# EAGLE board epapertagjig (EAGLE 9.6.2)
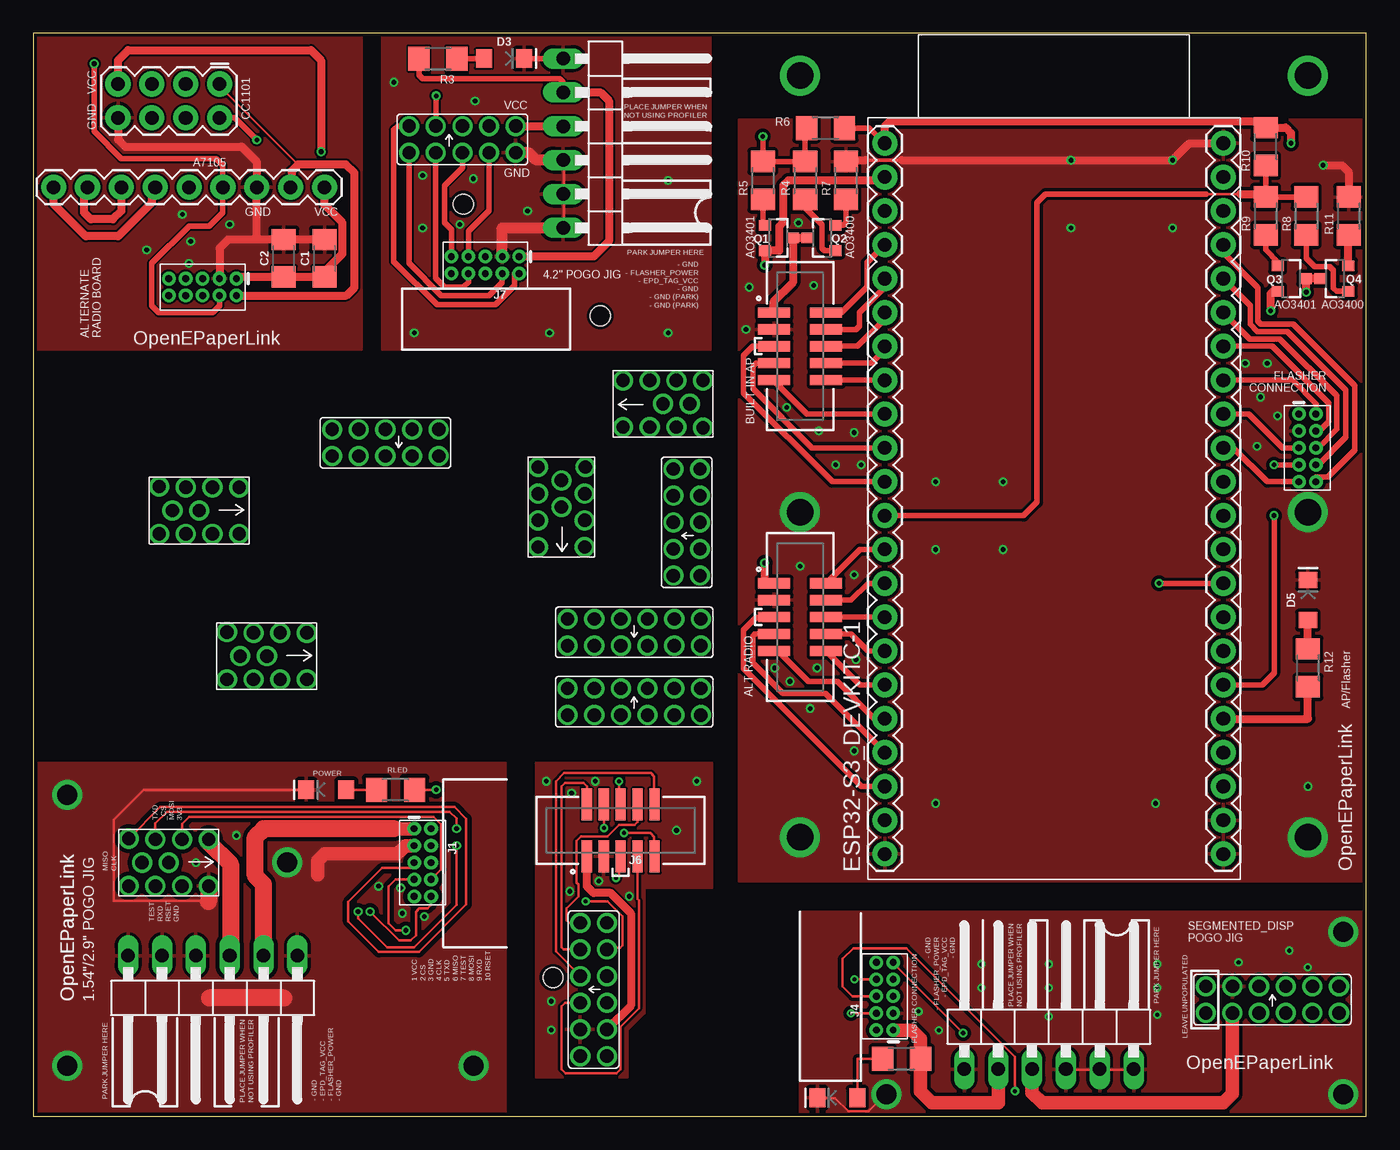
[diagram p0: board, top side]
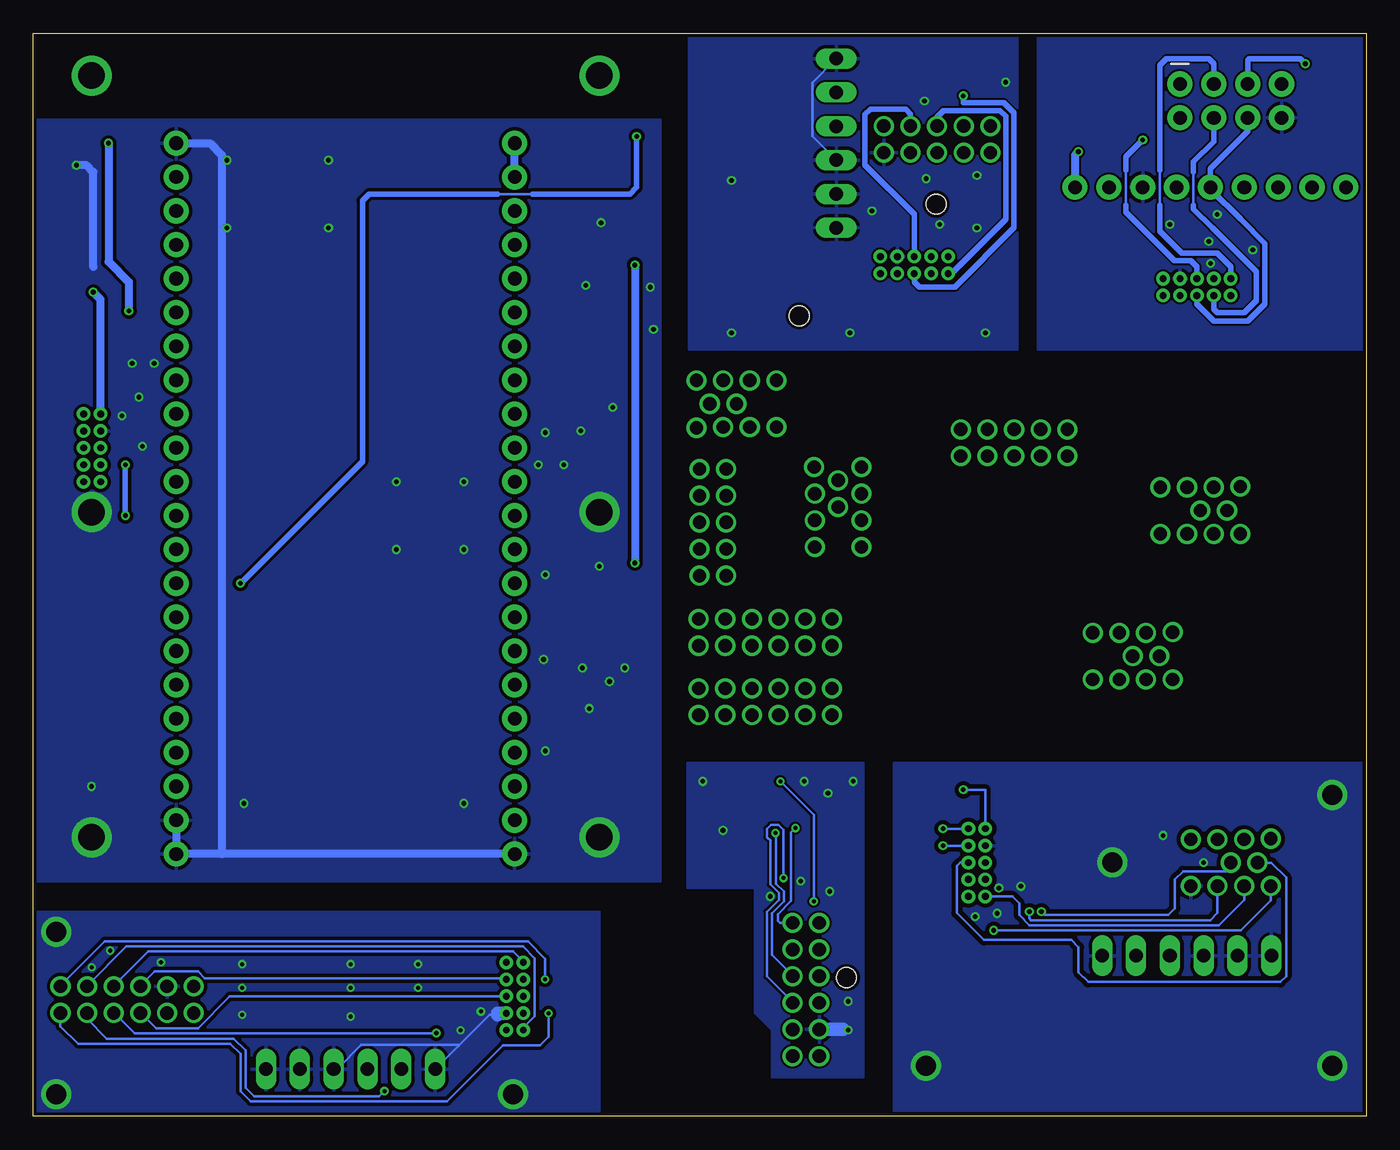
[diagram p1: board, bottom side, seen from below]

Size 100 x 81.27 mm. Coordinates in mm from the lower left corner, seen from the top.
Outline: 0,0 100,0 100,81.27 0,81.27 0,0
Copper layers (1*16): Top 0.035mm / dielectric 1.5mm / Bottom 0.035mm
Design rules "dirt_cheap_dirty_boards.v1.1": minimum track width 6mil, minimum drill 12mil, track to track 6mil, track to pad 6mil, pad to pad 6mil, via to via 6mil, smd to smd 0mil, copper to edge 10mil, drill to drill 10mil, minimum pad ring 10mil, minimum via ring 6mil, stop-mask expansion 2mil, vias tented up to drill 25mil, thermal gap 10mil
Net classes: 0 default: width 0.203 mm
Holes 1.5 mm at 38.99,10.41 32.26,68.45 42.55,60.07

## Footprints (pad centres in the part's own frame; a part is rotated, then mirrored left to right if it is on the bottom)
2X5-SMD-1.27MM = smd 0.76 x 2.4: 1 2.54,1.95; 2 2.54,-1.95; 3 1.27,1.95; 4 1.27,-1.95; 5 0,1.95; 6 0,-1.95; 7 -1.27,1.95; 8 -1.27,-1.95; 9 -2.54,1.95; 10 -2.54,-1.95
1206 = smd 1.6 x 1.8: 1 -1.4,0; 2 1.4,0
LED-1206 = smd 1.2 x 1.4: A -1.5,0; C 1.5,0
2X5-PTH-1.27MM = drill 0.508 pad 1: 1 -2.54,-0.635; 2 -2.54,0.635; 3 -1.27,-0.635; 4 -1.27,0.635; 5 0,-0.635; 6 0,0.635; 7 1.27,-0.635; 8 1.27,0.635; 9 2.54,-0.635; 10 2.54,0.635
SOLUM_ZBS_DEBUG = drill 1 pad 1.27: 3V3 -2.995,-1.744; CLK 0.005,0.006; CS 1.005,-1.744; GND -2.995,1.756; MISO 2.005,0.006; MOSI -0.995,-1.744; RSET -0.995,1.756; RXD 1.005,1.756; TEST 3.005,1.756; TXD 3.005,-1.794
SOLUM_ZBS_DEBUG_SEG = drill 1 pad 1.27: _CS 3,1; CLK 5,-1; EPD_BG -5,-1; EPD_VCOM -5,1; GND -3,1; MISO 3,-1; MOSI 5,1; RSET 1,1; RXD 1,-1; TEST -1,1; TXD -1,-1; VCC -3,-1
SOLUM_ZBS_DEBUG_4.2 = drill 1 pad 1.27: _CS -4,1; CLK -4,-1; GND 4,-1; MISO -2,1; MOSI -2,-1; RSET 0,1; RXD 0,-1; TEST 2,-1; TXD 2,1; VCC 4,1
ESP32-S3_DEVKITC-1 = drill 1.016 pad 1.88: 0 20.32,-25.4; 1 45.72,-25.4; 2 43.18,-25.4; 3 22.86,0; 3V3-1 53.34,0; 3V3-2 50.8,0; 4 45.72,0; 5 43.18,0; 5V 2.54,0; 6 40.64,0; 7 38.1,0; 8 25.4,0; 9 17.78,0; 10 15.24,0; 11 12.7,0; 12 10.16,0; 13 7.62,0; 14 5.08,0; 15 35.56,0; 16 33.02,0; 17 30.48,0; 18 27.94,0; 19 5.08,-25.4; 20 7.62,-25.4; 21 10.16,-25.4; 35 22.86,-25.4; 36 25.4,-25.4; 37 27.94,-25.4; 38 30.48,-25.4; 39 33.02,-25.4; 40 35.56,-25.4; 41 38.1,-25.4; 42 40.64,-25.4; 45 17.78,-25.4; 46 20.32,0; 47 12.7,-25.4; 48 15.24,-25.4; GND_1 0,0; GND_2 0,-25.4; GND_3 2.54,-25.4; GND_4 53.34,-25.4; RSET 48.26,0; RX 48.26,-25.4; TX 50.8,-25.4
1X09 = drill 1.016 pad 1.88: 1 0,0; 2 2.54,0; 3 5.08,0; 4 7.62,0; 5 10.16,0; 6 12.7,0; 7 15.24,0; 8 17.78,0; 9 20.32,0
2X4 = drill 1.016 pad 1.88: 1 -3.81,-1.27; 2 -3.81,1.27; 3 -1.27,-1.27; 4 -1.27,1.27; 5 1.27,-1.27; 6 1.27,1.27; 7 3.81,-1.27; 8 3.81,1.27
1X06/90 = drill 1.016 long: 1 -6.35,-3.81; 2 -3.81,-3.81; 3 -1.27,-3.81; 4 1.27,-3.81; 5 3.81,-3.81; 6 6.35,-3.81
SOT23-3 = smd 0.8 x 0.9: 1 -0.95,-1; 2 0.95,-1; 3 0,1.1
R1206 = smd 1.6 x 1.803: 1 -1.422,0; 2 1.422,0

## Placement (x,y rotation side)
ALTN_RADIO  JTAG  [2X5-SMD-1.27MM]  57.53,37.47 90 top
C1  1.0uF  [1206]  21.84,64.39 90 top
C2  1.0uF  [1206]  18.8,64.39 90 top
D1  [LED-1206]  21.97,24.51 180 top
D2  [LED-1206]  60.33,1.4 180 top
D3  [LED-1206]  35.31,79.38 0 top
D5  [LED-1206]  95.63,38.74 90 top
FLASHER_EDGE  CORTEX_JTAG_DEBUG_PTH  [2X5-PTH-1.27MM]  95.59,50.17 270 top
INTERNAL_AP  JTAG  [2X5-SMD-1.27MM]  57.53,57.79 90 top
J1  CORTEX_JTAG_DEBUG_PTH  [2X5-PTH-1.27MM]  29.21,19.05 270 top
J2  [SOLUM_ZBS_DEBUG]  10.16,19.05 180 top
J3  [SOLUM_ZBS_DEBUG_SEG]  92.96,8.76 0 top
J4  CORTEX_JTAG_DEBUG_PTH  [2X5-PTH-1.27MM]  63.88,9.02 90 top
J5  [SOLUM_ZBS_DEBUG_SEG]  42.04,9.53 90 top
J6  JTAG  [2X5-SMD-1.27MM]  44.07,21.46 180 top
J7  CORTEX_JTAG_DEBUG_PTH  [2X5-PTH-1.27MM]  33.91,63.88 180 top
J8  [SOLUM_ZBS_DEBUG_4.2]  32.2,73.31 0 top
J9  ESP32-S3_DEVKITC-1  [ESP32-S3_DEVKITC-1]  63.88,19.68 90 top
J10  CORTEX_JTAG_DEBUG_PTH  [2X5-PTH-1.27MM]  12.7,62.23 180 top
J11  [1X09]  21.84,69.72 180 top
J12  [2X4]  10.16,76.2 180 top
J13  [SOLUM_ZBS_DEBUG]  17.53,34.54 180 top
J14  [SOLUM_ZBS_DEBUG_SEG]  45.09,31.11 0 top
J15  [SOLUM_ZBS_DEBUG_4.2]  49.02,44.58 90 top
J16  [SOLUM_ZBS_DEBUG]  12.45,45.47 180 top
J17  [SOLUM_ZBS_DEBUG_SEG]  45.09,36.32 180 top
J18  [SOLUM_ZBS_DEBUG]  47.24,53.47 0 top
J19  [SOLUM_ZBS_DEBUG]  39.62,45.72 90 top
J20  [SOLUM_ZBS_DEBUG_4.2]  26.42,50.55 180 top
JP1  [1X06/90]  13.46,8.26 180 top
JP2  [1X06/90]  76.2,7.37 0 top
JP3  [1X06/90]  43.56,73.02 270 top
Q1  1.1A/60V/600mΩ  [SOT23-3]  55.88,65.91 270 top
Q2  5.8A/30V/35mΩ  [SOT23-3]  59.18,65.91 90 top
Q3  1.1A/60V/600mΩ  [SOT23-3]  94.36,62.87 270 top
Q4  5.8A/30V/35mΩ  [SOT23-3]  97.66,62.87 90 top
R1  [R1206]  27.18,24.51 0 top
R2  [R1206]  65.15,4.32 0 top
R3  [R1206]  30.35,79.38 180 top
R4  100  [R1206]  57.91,70.23 90 top
R5  100  [R1206]  54.74,70.23 90 top
R6  4k7  [R1206]  59.44,74.17 180 top
R7  47  [R1206]  60.96,70.23 90 top
R8  100  [R1206]  95.5,67.56 90 top
R9  100  [R1206]  92.46,67.56 90 top
R10  4k7  [R1206]  92.46,72.77 270 top
R11  47  [R1206]  98.68,67.56 90 top
R12  [R1206]  95.63,33.66 270 top

## Library data of the parts
ALTN_RADIO INTERNAL_AP J6 = SparkFun-Connectors; PROD_ID: CONN-14503
C1 C2 = SparkFun-Capacitors; PROD_ID: CAP-09822
D1-D3 D5 = SparkFun-LED
FLASHER_EDGE J1-J5 J7-J20 = SparkFun-Connectors
JP1-JP3 = pinhead
Q1 Q3 = SparkFun-DiscreteSemi; PROD_ID: TRANS-08285
Q2 Q4 = SparkFun-DiscreteSemi; PROD_ID: TRANS-12988
R1-R12 = rcl; SPICEPREFIX: R

## Nets
3V1: J8.VCC JP3.3
3V3: J2.3V3 JP1.3
GND: D1.C J1.3 J2.GND JP1.1 JP1.4 JP1.5 JP1.6
GND1: J5.GND J6.3
GND2: D2.C J3.GND J4.3 JP2.1 JP2.4 JP2.5 JP2.6
GND3: D3.C J7.3 J8.GND JP3.1 JP3.4 JP3.5 JP3.6
N$1: D2.A R2.1
N$2: D1.A R1.1
N$3: D3.A R3.1
N$4: J4.1 JP2.2 R2.2
N$5: J1.4 J2.CLK
N$6: J1.2 J2.CS
N$7: J1.6 J2.MISO
N$8: J3._CS J4.2
N$9: J1.8 J2.MOSI
N$10: J1.10 J2.RSET
N$11: J1.9 J2.RXD
N$12: J1.7 J2.TEST
N$13: J1.5 J2.TXD
N$14: J3.CLK J4.4
N$15: J3.MISO J4.6
N$16: J3.MOSI J4.8
N$17: J3.RSET J4.10
N$18: J3.VCC JP2.3
N$19: J3.RXD J4.9
N$20: J3.TEST J4.7
N$21: J3.TXD J4.5
N$22: J7.4 J8.CLK
N$23: J5._CS J6.2
N$24: J5.CLK J6.4
N$25: J5.MISO J6.6
N$26: J5.MOSI J6.8
N$27: J5.RSET J6.10
N$28: J5.VCC J6.1
N$29: J5.RXD J6.9
N$30: J5.TEST J6.7
N$31: J5.TXD J6.5
N$32: J7.2 J8._CS
N$33: J7.6 J8.MISO
N$34: J7.8 J8.MOSI
N$35: J7.10 J8.RSET
N$36: J7.9 J8.RXD
N$37: J7.7 J8.TEST
N$38: J7.5 J8.TXD
N$39: INTERNAL_AP.1 Q1.3 Q2.3
N$40: Q2.2 R7.1
N$41: J9.0 R4.2 R5.2 R6.2
N$42: Q2.1 R4.1
N$43: Q1.1 R5.1
N$44: FLASHER_EDGE.1 Q3.3 Q4.3
N$45: J9.8 R8.2 R9.2 R10.2
N$46: Q4.1 R8.1
N$47: Q3.1 R9.1
N$48: Q4.2 R11.1
N$49: INTERNAL_AP.5 J9.18
N$50: INTERNAL_AP.9 J9.16
N$52: INTERNAL_AP.10 J9.15
N$53: INTERNAL_AP.8 J9.7
N$54: INTERNAL_AP.6 J9.6
N$55: INTERNAL_AP.4 J9.5
N$56: INTERNAL_AP.2 J9.4
N$57: FLASHER_EDGE.6 J9.42
N$58: FLASHER_EDGE.10 J9.1
N$59: FLASHER_EDGE.8 J9.2
N$60: FLASHER_EDGE.4 J9.41
N$61: FLASHER_EDGE.2 J9.40
N$62: ALTN_RADIO.2 J9.3
N$63: ALTN_RADIO.4 J9.46
N$64: ALTN_RADIO.6 J9.9
N$65: ALTN_RADIO.8 J9.10
N$66: ALTN_RADIO.10 J9.11
N$67: ALTN_RADIO.9 J9.12
N$68: ALTN_RADIO.7 J9.13
N$69: ALTN_RADIO.5 J9.14
N$70: FLASHER_EDGE.5 J9.39
N$71: FLASHER_EDGE.9 J9.38
N$72: FLASHER_EDGE.7 J9.47
N$73: INTERNAL_AP.7 J9.17
N$75: J9.21 R12.2
N$76: D5.A R12.1
N$77: C1.1 C2.1 J10.1 J11.1 J12.7
N$78: J11.7 J11.8
N$79: C1.2 C2.2 J10.3 J11.3 J12.8
N$80: J11.6 J11.9
N$81: J10.6 J11.5 J12.6
N$82: J10.4 J11.4 J12.5
N$83: J10.2 J11.2 J12.1
N$84: J10.8 J12.4
N$86: J10.5 J12.2
N$87: J10.9 J12.3
V_IN: J1.1 JP1.2 R1.2
V_IN1: J7.1 JP3.2 R3.2
VDD: ALTN_RADIO.1 J9.3V3-1 J9.3V3-2 Q1.2 Q3.2 R6.1 R10.1
VSS: ALTN_RADIO.3 D5.C FLASHER_EDGE.3 INTERNAL_AP.3 J9.GND_1 J9.GND_2 J9.GND_3 J9.GND_4 R7.2 R11.2

## Tracks (layer width: path | path; a pad name or v marks a point on that pad's centre or on a via)
3V1
  Top 0.61: J8.VCC 39.75,74.31 JP3.3
3V3
  Top 1.27: J2.3V3 13.15,20.58 14.8,18.94 14.8,12.83 14.86,12.83 14.86,12.06 JP1.3
GND  (via drill 0.35, 1.5)
  Top 0.203: 13.15,16.13 13.15,16.18 6.04,16.18 6.04,22.26 8.3,24.51 D1.C
  Top 1.016: 21.32,18.11 21.32,19.16 21.84,19.68 27.3,19.68 27.94,20.32 J1.3
  Top 1.27: J2.GND 13.15,16.13 | 18.8,8.89 13.21,8.89
  other vias: 15.24,21.08 25.91,17.27 27.69,15.24 27.56,17.14 29.34,14.99 12.19,19.05 19.05,19.05 2.54,24.13 2.54,3.81 33.02,3.81
  pour Top (isolate 0.305): 0.13,26.54 35.43,26.54 35.43,0.13 0.13,0.13
  pour Bottom (isolate 0.305): 0.13,26.54 35.43,26.54 35.43,0.13 0.13,0.13
GND1  (via drill 0.35)
  Bottom 1.016: J5.GND 39.24,6.53
  other vias: 42.42,17.65 44.7,16.51 38.86,8.64 38.86,6.48 48.26,21.46 49.78,25.15 38.48,25.15 40.26,16.89 40.39,24.26 42.16,25.15
  pour Top: 37.72,26.54 50.93,26.54 50.93,17.14 45.85,17.14 45.85,7.75 44.58,6.48 44.58,2.92 37.72,2.92
  pour Bottom: 37.72,2.92 44.58,2.92 44.58,6.48 45.85,7.75 45.85,17.14 50.93,17.14 50.93,26.54 37.72,26.54
GND2  (via drill 0.3, 1.5)
  Top 0.203: JP2.4 77.52,3.51 79.89,3.51 JP2.5 | 80.27,3.51 80.02,3.51 JP2.5 | 80.27,3.51 82.52,3.51 JP2.6 | D2.C 58.89,1.38 60.14,1.38 61.14,0.38 62.64,0.38 63.89,1.63 v64.01,1.65 | 80.27,3.51 JP2.5
  Bottom 0.203: 65.15,7.63 65.77,7.63 68.08,5.32 | 68.08,5.32 69.77,3.63 JP2.1 | JP2.4 77.39,3.63 77.14,3.63 75.39,5.38 68.14,5.38 68.08,5.32
  Bottom 1.016: J4.3 65.15,7.75 65.15,7.63
  other vias: 98.3,1.65 98.3,13.84 94.23,12.45 95.63,11.18 84.33,11.43 90.42,11.56 84.33,9.65 76.2,11.43 76.2,9.65 71.12,11.43 71.12,9.65 76.2,7.49 84.33,7.62 66.42,7.87 67.94,6.48
  pour Top (isolate 0.254): 57.53,15.37 57.53,0.13 99.82,0.13 99.82,15.37
  pour Bottom (isolate 0.254): 57.53,15.37 57.53,0.13 99.82,0.13 99.82,15.37
GND3  (via drill 0.35)
  Top 0.203: JP3.4 39.81,71.69 39.81,69.31 JP3.5 39.81,69.19 39.81,66.69 JP3.6
  Top 0.406: JP3.1 D3.C
  Top 0.813: 39.81,66.69 35.18,66.69 J7.3 | JP3.4 37.72,71.75 37.16,72.31 J8.GND
  Bottom 0.203: JP3.1 39.81,79.31 41.56,77.56 41.56,73.56 39.81,71.81 JP3.4
  other vias: 27.05,77.6 33.15,76.2 32,66.93 29.21,66.67 29.21,70.61 33.02,70.36 28.57,58.8 37.08,67.94 38.73,58.8 47.62,58.8 47.62,70.23
  pour Top: 50.8,57.53 50.8,81.15 26.16,81.15 26.16,57.53
  pour Bottom: 26.16,81.15 26.16,57.53 50.8,57.53 50.8,81.15
N$1
  Top 0.203: R2.1 61.83,4.32 D2.A
N$2
  Top 0.203: R1.1 D1.A
N$3
  Top 0.406: D3.A R3.1
N$4
  Top 1.016: JP2.2 72.39,1.02 67.44,1.02 66.57,1.88 R2.2 66.57,5.82 65.91,6.48 J4.1
N$5  (via drill 0.35)
  Top 0.203: v24.36,15.37 24.36,14.88 26.54,12.7 28.57,12.7 31.75,15.88 v31.75,20.32
  Bottom 0.203: v24.36,15.37 24.38,15.37 24.13,15.11 14.86,15.11 14.35,15.62 14.35,17.78 13.73,18.4 10.15,18.4 J2.CLK | v31.75,20.32 J1.4
N$6  (via drill 0.35)
  Top 0.203: J2.CS 9.15,21.98 10.03,22.86 31.24,22.86 31.75,22.35 v31.75,21.59
  Bottom 0.203: v31.75,21.59 J1.2
N$7
  Bottom 0.203: J2.MISO 7.1,19.04 5.99,17.93 5.99,10.52 6.43,10.08 20.85,10.08 21.59,10.82 21.59,12.7 22.13,13.24 28.67,13.24 30.71,15.27 30.71,18.8 30.45,19.05 J1.6
N$8
  Bottom 0.203: J4.2 63.14,6.51 63.14,6.76 62.39,7.51 62.39,11.88 63.27,12.76 93.02,12.76 95.89,9.88 J3._CS
N$9
  Top 0.203: J1.8 30.61,18.54 30.61,21.91 30.03,22.48 11.68,22.48 11.15,21.95 J2.MOSI
N$10  (via drill 0.35)
  Top 0.203: v25.27,15.37 27.43,13.21 28.32,13.21 28.7,13.59 28.7,15.37 28.96,15.62 29.59,15.62 29.84,15.88 J1.10
  Bottom 0.203: J2.RSET 11.15,15.26 11.68,14.73 25.15,14.73 25.27,14.86 v25.27,15.37
N$11
  Bottom 0.203: J2.RXD 9.15,16.25 11.05,14.35 25.27,14.35 26.04,15.11 26.04,16 26.54,16.51 J1.9
N$12  (via drill 0.35)
  Top 0.203: v27.94,13.97 27.18,13.97 26.67,14.48 26.67,17.27 27.18,17.78 J1.7
  Bottom 0.203: J2.TEST 7.16,16.21 9.4,13.97 v27.94,13.97
N$13
  Top 0.203: J2.TXD 9.53,23.22 31.6,23.22 32.48,22.33 32.48,15.9 28.93,12.34 25.92,12.34 23.63,14.63 23.63,16.1 26.17,18.64 28.57,18.64 J1.5
N$14  (via drill 0.3)
  Top 0.203: J4.4 v61.34,7.75
  Bottom 0.203: v61.34,7.75 61.34,5.97 61.98,5.33 64.77,5.33 68.96,1.14 83.69,1.14 84.45,1.91 84.45,4.7 85.22,5.46 96.65,5.46 97.96,6.78 J3.CLK
N$15  (via drill 0.3)
  Top 0.203: J4.6 61.47,9.02 60.71,9.78 60.71,11.81 61.53,12.63 65.52,12.63 73.66,4.49 73.66,4.47 v73.66,1.91
  Bottom 0.203: J3.MISO 95.96,7.32 94.49,5.84 84.96,5.84 84.07,4.95 84.07,2.16 83.44,1.52 74.04,1.52 v73.66,1.91
N$16  (via drill 0.3)
  Top 0.203: v61.59,10.29 J4.8
  Bottom 0.203: J3.MOSI 97.89,9.88 94.64,13.13 62.89,13.13 61.59,11.84 v61.59,10.29
N$17
  Bottom 0.203: J4.10 63.27,11.63 64.02,12.38 91.39,12.38 93.89,9.88 J3.RSET
N$18
  Top 1.016: JP2.3 74.93,1.78 75.69,1.02 89.28,1.02 89.96,1.7 J3.VCC
N$19  (via drill 0.35)
  Top 0.203: v69.77,6.26 64.52,11.51 J4.9
  Bottom 0.203: v69.77,6.26 92.39,6.26 93.89,7.76 J3.RXD
N$20
  Bottom 0.203: J4.7 64.52,10.38 87.14,10.38 87.64,10.88 90.89,10.88 91.89,9.88 J3.TEST
N$21
  Bottom 0.203: J4.5 64.52,9.01 85.27,9.01 87.64,6.63 90.77,6.63 91.89,7.76 J3.TXD
N$22
  Top 0.406: J7.4 35.18,62.58 34.2,61.6 30.61,61.6 28.19,64.01 J8.CLK
N$23
  Top 0.203: J6.2 41.53,24.77 41.27,25.02 39.88,25.02 39.62,24.77 39.62,12.7 39.8,12.53 J5._CS
N$24  (via drill 0.3)
  Top 0.203: v42.83,21.63 42.83,23.38 J6.4
  Bottom 0.203: v42.83,21.63 43.15,21.32 43.15,16.17 44.13,15.18 44.13,14.67 43.99,14.53 J5.CLK
N$25  (via drill 0.3)
  Top 0.203: v43.96,25.13 43.96,23.51 J6.6 | v41.45,16.15 v41.45,16.14 43.08,16.14 44.21,15.01 44.21,12.84 44,12.63 43.08,12.63 J5.MISO
  Bottom 0.203: v43.96,25.13 41.45,22.62 v41.45,16.15
N$26
  Top 0.203: J6.8 45.33,23.38 45.33,22.1 45.12,21.88 43.96,21.88 43.08,21.01 41.08,21.01 40.77,20.7 40.77,17.53 40.89,17.4 40.89,16.51 40.01,15.62 40.01,14.73 40.21,14.53 J5.MOSI
N$27
  Top 0.203: J6.10 46.58,23.51 46.58,25.53 46.35,25.76 39.83,25.76 39.21,25.13 39.21,12.38 40.96,10.63 J5.RSET
N$28
  Top 0.61: J5.VCC 44.83,8.32 44.83,15.24 43.31,16.76 42.04,16.76 41.53,17.27 J6.1
N$29  (via drill 0.3)
  Top 0.203: v44.33,21.26 46.3,21.26 46.58,20.98 46.58,19.63 J6.9
  Bottom 0.203: J5.RXD 43.08,10.63 44.59,12.14 44.59,15.23 43.69,16.12 43.69,16.9 44.27,17.47 44.27,21.26 v44.33,21.26
N$30
  Top 0.203: J6.7 45.34,16.33 45.44,16.23 45.44,8.1 44.07,6.73 44.07,3.56 43.75,3.24 39.94,3.24 39.62,3.56 39.62,6.88 39.62,8.26 39.89,8.53 J5.TEST
N$31  (via drill 0.3)
  Top 0.203: v43.71,17.89 43.96,18.14 43.96,19.51 J6.5
  Bottom 0.203: v43.71,17.89 43.71,21.51 44.08,21.88 44.66,21.88 44.96,21.59 44.96,20.95 44.7,20.7 44.7,17.4 44.07,16.76 44.07,16.26 44.96,15.37 44.96,10.51 43.08,8.63 J5.TXD
N$32
  Top 0.406: J7.2 36.09,63.25 36.09,62.33 34.67,60.91 30.28,60.91 27.04,64.15 27.04,74.02 27.32,74.31 J8._CS
N$33  (via drill 0.35)
  Top 0.406: v30.23,76.58 30.23,74.31 J8.MISO
  Bottom 0.406: J7.6 33.91,62.61 33.53,62.23 30.86,62.23 26.42,66.67 26.42,75.31 27.18,76.07 30.23,76.07 v30.23,76.58
N$34
  Top 0.406: J7.8 32.64,62.61 32.26,62.23 30.86,62.23 30.2,62.9 J8.MOSI
N$35
  Bottom 0.406: J7.10 31.11,63.25 27.04,67.33 27.04,75.04 27.46,75.47 31.72,75.47 32.2,74.99 J8.RSET
N$36
  Top 0.406: J7.9 31.37,66.55 30.86,67.06 30.86,69.85 32.2,71.18 J8.RXD
N$37
  Top 0.406: J7.7 32.64,66.42 34.2,67.98 J8.TEST
N$38
  Bottom 0.406: J7.5 33.91,67.69 37.59,71.37 37.59,75.18 37.21,75.56 34.54,75.56 34.2,75.22 J8.TXD
N$39
  Top 0.406: 55.5,60.33 INTERNAL_AP.1
  Top 0.61: Q2.3 Q1.3 56.98,62.57 55.5,61.09 55.5,60.33
N$40
  Top 0.406: Q2.2 60.77,66.86 60.96,67.06 R7.1
N$41  (via drill 0.35)
  Top 0.406: R6.2 57.91,74.17 R4.2 R5.2 v54.74,73.53 | v84.45,40.01 J9.0
  Bottom 0.203: 62.53,69.21 65.15,69.21
  Bottom 0.406: v54.74,73.53 54.74,69.72 55.24,69.21 62.53,69.21 | 65.15,69.21 74.8,69.21 75.31,68.71 75.31,49.15 v84.45,40.01
N$42
  Top 0.406: Q2.1 59.37,64.96 59.18,65.15 59.18,66.93 57.91,68.2 R4.1
N$43
  Top 0.406: Q1.1 54.75,66.99 54.75,68.81 R5.1
N$44  (via drill 0.35)
  Top 0.406: Q3.3 95.5,62.87
  Top 0.61: v95.5,61.85 95.5,62.87 Q4.3
  Bottom 0.61: FLASHER_EDGE.1 94.95,61.3 v95.5,61.85
N$45
  Top 0.203: 88.01,69.21 90.55,69.21
  Top 0.406: R8.2 R9.2 92.46,69.21 R10.2 | 88.01,69.21 75.95,69.21 75.31,68.58 75.31,46.1 74.3,45.09 J9.8
  Top 0.61: 90.55,69.21 92.46,69.21
N$46
  Top 0.406: R8.1 95.5,64.39 96.14,63.75 97.28,63.75 97.54,63.5 97.54,62.17 97.79,61.92 Q4.1
N$47
  Top 0.406: Q3.1 93.36,64.12 92.46,65.02 R9.1
N$48
  Top 0.406: 98.66,66.14 R11.1
  Top 0.61: Q4.2 98.66,66.14
N$49
  Top 0.406: J9.18 59.94,47.62 53.29,54.28 53.29,57.1 53.98,57.79 INTERNAL_AP.5
N$50
  Top 0.406: J9.16 58.04,52.71 55.58,55.16 INTERNAL_AP.9
N$51  (via drill 2)
  other vias: 57.53,78.1
N$52
  Top 0.406: INTERNAL_AP.10 J9.15
N$53
  Top 0.406: J9.7 63.88,57.53 62.87,56.52 INTERNAL_AP.8
N$54
  Top 0.406: INTERNAL_AP.6 61.85,57.79 63.88,59.82 J9.6
N$55
  Top 0.406: INTERNAL_AP.4 61.72,59.05 61.98,59.31 61.98,60.33 63.88,62.23 J9.5
N$56
  Top 0.406: INTERNAL_AP.2 60.63,60.33 62.53,62.23 62.53,64.06 J9.4
N$57
  Top 0.406: J9.42 91.26,58.34 93.52,58.34 97.79,54.08 97.79,51.56 96.39,50.17 FLASHER_EDGE.6
N$58
  Top 0.406: FLASHER_EDGE.10 96.22,47.98 97.14,47.98 99.16,50.01 99.16,54.84 94.54,59.46 92.08,59.46 91.87,59.67 91.87,62.21 89.28,64.8 J9.1
N$59
  Top 0.406: J9.2 91.31,60.83 91.31,59.44 91.85,58.9 94.08,58.9 98.48,54.51 98.48,50.98 96.39,48.9 FLASHER_EDGE.8
N$60
  Top 0.406: FLASHER_EDGE.4 96.25,51.41 96.5,51.41 97.21,52.12 97.21,53.54 92.96,57.79 J9.41
N$61
  Top 0.406: FLASHER_EDGE.2 96.27,52.71 96.27,53.47 94.49,55.25 J9.40
N$62
  Top 0.406: ALTN_RADIO.2 62.02,42.55 J9.3
N$63
  Top 0.406: ALTN_RADIO.4 61.34,38.74 62.61,40.01 J9.46
N$64
  Top 0.406: ALTN_RADIO.6 J9.9
N$65
  Top 0.406: ALTN_RADIO.8 61.34,36.2 62.61,34.93 J9.10
N$66
  Top 0.406: J9.11 62.02,32.38 ALTN_RADIO.10
N$67
  Top 0.406: ALTN_RADIO.9 55.88,34.93 58.17,32.64 60.33,32.64 63.12,29.84 J9.12
N$68
  Top 0.406: ALTN_RADIO.7 54.1,36.2 53.98,36.07 53.98,34.04 56.26,31.75 59.44,31.75 J9.13
N$69
  Top 0.406: ALTN_RADIO.5 55.58,37.44 54.23,37.44 53.29,36.5 53.29,33.6 62.13,24.77 J9.14
N$70
  Top 0.406: FLASHER_EDGE.5 93.73,50.17 91.19,52.71 J9.39
N$71
  Top 0.406: FLASHER_EDGE.9 92.58,47.62 90.04,50.17 J9.38
N$72  (via drill 0.35)
  Top 0.406: FLASHER_EDGE.7 v93.09,48.9 | v93.09,45.09 93.09,33.27 92.2,32.38 J9.47
  Bottom 0.406: v93.09,48.9 v93.09,45.09
N$73
  Top 0.406: J9.17 58.42,50.17 53.98,54.61 53.98,56.26 54.23,56.52 INTERNAL_AP.7
N$74  (via drill 2)
  other vias: 95.63,78.1
N$75
  Top 0.61: J9.21 95.63,29.84 R12.2
N$76
  Top 0.61: R12.1 D5.A
N$77  (via drill 0.35)
  Top 0.61: J10.1 15.24,62.99 C2.1 C1.1 21.84,63.37 23.2,64.73 23.2,67.05 21.84,68.4 J11.1 | J12.7 6.35,79.25 7.11,80.01 20.83,80.01 21.59,79.25 v21.59,72.39
  Bottom 0.61: v21.59,72.39 21.84,72.14 J11.1
N$78
  Top 0.61: J11.7 6.6,67.94 5.97,67.31 4.32,67.31 3.81,67.82 3.81,69.72 J11.8
N$79  (via drill 0.35)
  Top 0.61: C1.2 C2.2 | C2.2 14.61,65.79 13.97,65.15 J10.3 | C2.2 16.76,65.79 J11.3 16.76,71.63 15.62,72.77 6.86,72.77 6.35,73.28 J12.8
  other vias: 11.18,67.69 8.51,65.02 11.81,65.66 14.73,66.93 11.68,64.01
  pour Bottom: 0.13,81.15 24.64,81.15 24.64,57.53 0.13,57.53
  pour Top: 0.13,81.15 24.64,81.15 24.64,57.53 0.13,57.53
N$80
  Top 0.61: J11.6 8.89,69.72 8.89,68.58 6.35,66.04 3.94,66.04 1.52,68.45 J11.9
N$81
  Bottom 0.406: J10.6 12.7,60.96 11.43,59.69 8.89,59.69 7.62,60.96 7.62,65.51 9.42,67.31 11.68,69.57 J11.5 11.68,71.12 10.41,72.39 8.89,73.91 J12.6
N$82  (via drill 0.35)
  Top 0.406: J10.4 13.97,60.83 13.46,60.33 9.4,60.33 8.89,60.83 8.89,64.01 11.68,66.8 13.21,66.8 14.22,67.82 J11.4 14.22,71.37 13.72,71.88 6.6,71.88 4.57,73.91 v4.57,78.99
  Bottom 0.406: v4.57,78.99 4.95,79.38 8.76,79.38 8.89,79.25 J12.5
N$83
  Top 0.203: J12.1 14,77.27 19.75,71.52 19.86,71.42
  Top 0.61: J10.2 23.5,61.6 24.09,62.19 24.09,70.78 23.44,71.42 19.86,71.42 19.38,70.94 19.38,69.72 J11.2
N$84
  Bottom 0.203: 12.95,68.38 12.95,70.87
  Bottom 0.406: J10.8 11.43,60.58 11.18,60.33 9.14,60.33 8.26,61.21 8.26,63.37 11.56,66.67 12.95,68.07 12.95,68.38 | 12.95,70.87 12.95,71.63 11.43,73.15 J12.4
N$86  (via drill 0.35)
  Top 0.406: v16.76,73.28 15.11,74.93 J12.2
  Bottom 0.203: 18.03,68.38 18.03,70.99
  Bottom 0.406: J10.5 12.7,63.75 13.16,64.21 14.4,64.21 16.05,65.86 17.5,67.31 18.03,67.84 18.03,68.38 | 18.03,70.99 18.03,72.01 v16.76,73.28
N$87
  Bottom 0.203: 15.49,68.38 15.49,70.99
  Bottom 0.406: J10.9 10.16,63.75 11.18,64.77 13.84,64.77 15.49,66.42 15.49,68.38 | 15.49,70.99 15.49,78.87 14.99,79.38 11.81,79.38 11.43,78.99 J12.3
V_IN  (via drill 0.35)
  Top 0.203: v30.23,24.51 R1.2
  Top 1.016: J1.1 27.05,21.59
  Top 1.27: JP1.2 17.27,17.43 16.65,18.05 16.65,20.97 17.27,21.59 27.05,21.59
  Bottom 0.203: J1.1 28.57,24.51 v30.23,24.51
V_IN1
  Top 0.406: R3.2 28.93,78.13 29.21,77.85 39.5,77.85 39.75,77.6 JP3.2
  Top 0.61: JP3.2 42.55,76.83 43.18,76.2 43.18,65.66 42.04,64.52 J7.1
VDD  (via drill 0.35)
  Top 0.406: R6.1 62.74,74.17 J9.3V3-1
  Top 0.61: v94.36,73.02 94.36,73.79 93.95,74.19 R10.1 92.46,74.68 64.26,74.68 63.88,74.3 J9.3V3-1 | v92.84,60.45 92.84,61.72 93.03,61.92 Q3.2 | J9.3V3-2 63.88,70.23 56.64,70.23 56.26,69.85 56.26,67.08 55.95,66.77 55.95,64.96 Q1.2 54.88,64.01 54.86,64.01 v54.86,63.88 | v54.86,41.53 54.86,40.01 ALTN_RADIO.1
  Bottom 0.61: v94.36,73.02 94.36,64.14 92.84,62.61 v92.84,60.45 | J9.3V3-2 J9.3V3-1 | v54.86,63.88 v54.86,41.53
VSS  (via drill 0.35, 2)
  Top 0.254: 62.43,71.75 65.15,71.75
  Top 0.61: v96.77,71.37 98.17,71.37 98.68,70.87 R11.2 | R7.2 60.96,71.75 62.43,71.75 | 65.15,71.75 v77.85,71.75 v85.47,71.75 86.74,73.02 J9.GND_4
  Bottom 0.61: 95.5,63.75 95.5,70.87 96.01,71.37 v96.77,71.37 | J9.GND_4 86.74,73.02 85.85,72.14 85.85,19.68 | 85.85,19.68 J9.GND_2 J9.GND_3 | J9.GND_1 85.85,19.68
  other vias: 58.29,30.61 61.59,27.43 55.63,33.66 56.77,32.64 57.53,41.28 58.8,33.66 61.72,34.29 61.59,40.64 56.52,53.21 58.93,51.44 61.59,51.31 60.2,48.9 62.1,48.9 57.4,67.06 90.93,56.52 92.58,56.52 92.08,53.98 93.34,52.58 91.82,50.29 57.53,45.34 95.63,45.34 57.53,20.95 95.63,20.95 67.69,23.5 84.2,23.5 95.63,24.77 72.77,42.55 67.69,42.55 72.77,47.62 67.69,47.62 77.85,66.67 85.47,66.67 53.47,59.05 53.72,62.23 58.55,62.36
  pour Top (isolate 0.254): 52.96,17.65 52.96,74.8 99.95,74.8 99.95,17.65
  pour Bottom (isolate 0.254): 52.96,74.8 52.96,17.65 99.95,17.65 99.95,74.8

## Text on the board
tNames: VCC | PLACE JUMPER WHEN / NOT USING PROFILER | CC1101 | VCC | GND | A7105 | GND | GND | VCC | PARK JUMPER HERE | - GND / - FLASHER_POWER / - EPD_TAG_VCC / - GND / - GND (PARK) / - GND (PARK) | AO3401 | AO3400 | 4.2" POGO JIG | AO3401 | AO3400 | OpenEPaperLink | ALTERNATE / RADIO BOARD | FLASHER / CONNECTION | BUILT-IN AP | ALT RADIO | AP/Flasher | RLED | POWER | TXD / _CS / MOSI / 3V3 | MISO / CLK | OpenEPaperLink | TEST / RXD / RSET / GND | PLACE JUMPER WHEN / NOT USING PROFILER | PARK JUMPER HERE | - GND / - FLASHER_POWER / - EPD_TAG_VCC / - GND | SEGMENTED_DISP / POGO JIG | FLASHER CONNECTION | 1 VCC / 2 CS / 3 GND / 4 CLK / 5 TXD / 6 MISO / 7 TEST / 8 MOSI / 9 RXD / 10 RSET | OpenEPaperLink | OpenEPaperLink | 1.54"/2.9" POGO JIG | LEAVE UNPOPULATED | OpenEPaperLink | PARK JUMPER HERE | PLACE JUMPER WHEN / NOT USING PROFILER | - GND / - EPD_TAG_VCC / - FLASHER_POWER / - GND
tValues: FLASHER CONNECTION